# EAGLE board C-Gleis-Weichenbeleuchtung_Jw_016_01_07 (EAGLE 5.10)
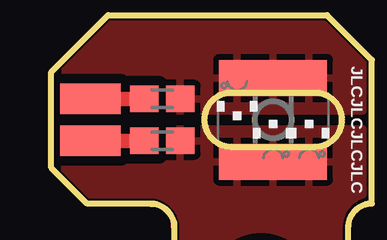
[diagram p0: board, top side]
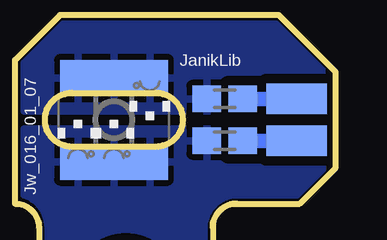
[diagram p1: board, bottom side, seen from below]

No outline drawn. Coordinates in mm, seen from the top.
Copper layers (1*16): Top 0.035mm / dielectric 1.5mm / Bottom 0.035mm
Design rules "default *": minimum track width 7mil, minimum drill 0.6mm, track to track 8mil, track to pad 8mil, pad to pad 8mil, via to via 8mil, smd to smd 8mil, copper to edge 40mil, drill to drill 8mil, minimum pad ring 10mil, minimum via ring 8mil, stop-mask expansion 4mil, vias tented up to drill 0mil, thermal gap 10mil
Holes 2.5 mm at 8.75,3.25
Milling: 24 lines

## Footprints (pad centres in the part's own frame; a part is rotated, then mirrored left to right if it is on the bottom)
CHIPLED_1206 = smd 1.5 x 1.5: A 0,-1.75; C 0,1.75
SMD1,27-2,54 = smd 1.27 x 2.54: 1 0,0
R0603S = smd 1.2 x 1.1: 1 -0.75,0; 2 0.75,0

## Placement (x,y rotation side)
LEDACL1  [CHIPLED_1206]  7.75,10.25 0 bottom
LEDACL2  [CHIPLED_1206]  9.25,10.25 180 bottom
LEDACR1  [CHIPLED_1206]  7.75,10.25 0 top
LEDACR2  [CHIPLED_1206]  9.25,10.25 180 top
LEDDCL  [CHIPLED_1206]  10.75,10.25 180 bottom
LEDDCR  [CHIPLED_1206]  10.75,10.25 180 top
MINUS  [SMD1,27-2,54]  1.62,9.38 90 top
MINUS1  [SMD1,27-2,54]  1.62,9.38 270 bottom
PLUS  [SMD1,27-2,54]  1.62,11.12 270 top
PLUS1  [SMD1,27-2,54]  1.62,11.12 270 bottom
R1  4k7  [R0603S]  4.62,9.38 180 top
R2  4k7  [R0603S]  4.62,11.12 0 top
R3  4k7  [R0603S]  4.62,11.12 180 bottom
R4  4k7  [R0603S]  4.62,9.38 0 bottom

## Library data of the parts
LEDACL1 LEDACL2 LEDACR1 LEDACR2 LEDDCL LEDDCR = led
MINUS MINUS1 PLUS PLUS1 = wirepad
R1-R4 = rcl

## Nets
N$1: MINUS.1 R1.2
N$2: LEDACL1.C LEDACL2.A LEDDCL.A R3.2
N$3: LEDACR1.A LEDACR2.C LEDDCR.C R1.1
N$4: LEDACR1.C LEDACR2.A LEDDCR.A R2.2
N$5: PLUS.1 R2.1
N$6: LEDACL1.A LEDACL2.C LEDDCL.C R4.1
N$7: PLUS1.1 R3.1
N$8: MINUS1.1 R4.2

## Tracks (layer width: path | path; a pad name or v marks a point on that pad's centre or on a via)
N$1
  Top 0.61: MINUS.1 R1.2
N$2
  pour Bottom (isolate 0.406): 11.38,14.25 2.5,14.25 0.38,12.12 0.38,10.62 13,10.62 13,12.62
N$3
  pour Top (isolate 0.406): 0.38,9.88 13,9.88 13,7.12 arc72 12,5.75 12,3.3 9.38,0.68 8.12,0.68 5.5,3.3 5.5,5.75 arc90 4,7.12 1.62,7.12 0.38,8.38
N$4
  pour Top (isolate 0.406): 2.5,14.25 11.38,14.25 13,12.62 13,10.62 0.38,10.62 0.38,12.12
N$5
  Top 0.61: PLUS.1 R2.1
N$6
  pour Bottom (isolate 0.406): 0.38,9.88 13,9.88 13,7.12 arc72 12,5.75 12,3.3 9.38,0.68 8.12,0.68 5.5,3.3 5.5,5.75 arc90 4,7.12 1.62,7.12 0.38,8.38
N$7
  Bottom 0.61: PLUS1.1 R3.1
N$8
  Bottom 0.61: MINUS1.1 R4.2

## Text on the board
tNames: JLCJLCJLCJLC
bNames: JanikLib | Jw_016_01_07
tStop: design by Janik Merz | + | C-Gleis Weiche | Rechts
bStop: design by Janik Merz | + | - | C-Gleis Weiche | Links
Document: 1206 LEDs kopfüber einlöten | Entweder 2 Stück antiparallel für AC | oder 1 Stück (mittig) für DC | Bei höheren Versorgungsspannungen | bitte zwei Widerstande (mit je halbem Wert) | benutzen um Verlustleistung zu verteilen | Empfehlung: 5V, dann reicht ein Widerstand